# EAGLE board Circuit (EAGLE 9.7.0)

Size 140.42 x 161.04 mm. Coordinates in mm from the lower left corner, seen from the top.
Outline: 0,0 140.42,0 140.42,161.04 0,161.04 0,0
Copper layers (1*16): Top 0.035mm / dielectric 1.5mm / Bottom 0.035mm
Design rules "default": minimum track width 6mil, minimum drill 0.35mm, track to track 6mil, track to pad 6mil, pad to pad 6mil, via to via 6mil, smd to smd 6mil, copper to edge 40mil, drill to drill 6mil, minimum pad ring 10mil, minimum via ring 8mil, stop-mask expansion 4mil, vias tented up to drill 0mil, thermal gap 10mil

## Footprints (pad centres in the part's own frame; a part is rotated, then mirrored left to right if it is on the bottom)
HA-06-SM065 = drill 1 pad 1.676: 1 -2.54,-2.54; 2 0,2.54; 3 2.54,-2.54
SWITCH-MOMENTARY-PTH-6.5MM = drill 1.016 pad 1.88: 1 -3.251,2.261; 2 3.251,2.261; 3 -3.251,-2.261; 4 3.251,-2.261
ARDUINO-UNO-R3-SHIELD = drill 1.016 pad 1.88: 3.3V 24.13,-2.54; 5V 24.13,0; A0 24.13,12.7; A1 24.13,15.24; A2 24.13,17.78; A3 24.13,20.32; A4 24.13,22.86; A5 24.13,25.4; AREF -24.13,-13.97; D2 -24.13,20.32; D3 -24.13,17.78; D4 -24.13,15.24; D5 -24.13,12.7; D6 -24.13,10.16; D7 -24.13,7.62; D8 -24.13,3.81; D9 -24.13,1.27; D10 -24.13,-1.27; D11 -24.13,-3.81; D12 -24.13,-6.35; D13 -24.13,-8.89; GND@0 24.13,2.54; GND@1 24.13,5.08; GND@2 -24.13,-11.43; IOREF 24.13,-7.62; NC 24.13,-10.16; RES 24.13,-5.08; RX -24.13,25.4; SCL -24.13,-19.05; SDA -24.13,-16.51; TX -24.13,22.86; VIN 24.13,7.62

## Placement (x,y rotation side)
RPOT1  250k  [HA-06-SM065]  104.4,62.93 270 top
RPOT2  250k  [HA-06-SM065]  104.4,47.69 270 top
RPOT3  250k  [HA-06-SM065]  104.4,22.29 270 top
RPOT4  250k  [HA-06-SM065]  104.4,7.05 270 top
S1  SWITCH_MOMENTARY  [SWITCH-MOMENTARY-PTH-6.5MM]  133.06,152.78 0 top
S2  SWITCH_MOMENTARY  [SWITCH-MOMENTARY-PTH-6.5MM]  133.06,137.54 0 top
S3  SWITCH_MOMENTARY  [SWITCH-MOMENTARY-PTH-6.5MM]  133.06,124.84 0 top
U2  ARDUINO-UNO-R3-SHIELD  [ARDUINO-UNO-R3-SHIELD]  29.84,79.02 180 top

## Library data of the parts
RPOT1-RPOT4 S1-S3 U2 = Tinkercad

## Nets
S3_4: S1.3 S1.4 S2.3 S2.4 S3.3 S3.4
U2_A0: RPOT4.2 U2.A0
U2_A1: RPOT3.2 U2.A1
U2_A2: RPOT2.2 U2.A2
U2_A3: RPOT1.2 U2.A3
U2_D10: S3.1 S3.2 U2.D10
U2_D11: S2.1 S2.2 U2.D11
U2_D12: S1.1 S1.2 U2.D12
U2_GND: RPOT1.1 RPOT1.3 RPOT2.1 RPOT2.3 RPOT3.1 RPOT3.3 RPOT4.1 RPOT4.3 U2.GND@0 U2.GND@1 U2.GND@2

## Tracks (layer width: path | path; a pad name or v marks a point on that pad's centre or on a via)
S3_4  (5 unrouted)
U2_A0  (1 unrouted)
U2_A1  (1 unrouted)
U2_A2  (1 unrouted)
U2_A3  (1 unrouted)
U2_D10  (2 unrouted)
U2_D11  (2 unrouted)
U2_D12  (2 unrouted)
U2_GND  (10 unrouted)